# EAGLE board 4channelRock (EAGLE 7.1.0)

No outline drawn. Coordinates in mm, seen from the top.
Copper layers (1*16): Top 0.035mm / dielectric 1.5mm / Bottom 0.035mm
Design rules "default": minimum track width 10mil, minimum drill 24mil, track to track 8mil, track to pad 8mil, pad to pad 8mil, via to via 8mil, smd to smd 8mil, copper to edge 40mil, drill to drill 8mil, minimum pad ring 10mil, minimum via ring 8mil, stop-mask expansion 4mil, vias tented up to drill 0mil, thermal gap 10mil
Net classes: 0 default: width 0.203 mm; 1 vcc: width 0.254 mm

## Footprints (pad centres in the part's own frame; a part is rotated, then mirrored left to right if it is on the bottom)
DO-214AC = smd 1.8 x 2.4: A 2.025,0; C -2.025,0
SPC4078 = drill 0.8 pad 2.184 long: 1 -3,0; 2 0,-4.8 | drill 1 pad 2.184 long: 3 3,0
1X02 = drill 1.016 pad 1.88: 1 0,0; 2 2.54,0
SOT-23 = smd 0.8 x 0.9: 1 -0.95,-1; 2 0.95,-1; 3 0,1.1
R0603 = smd 1 x 1.1: 1 -0.85,0; 2 0.85,0

## Placement (x,y rotation side)
D1  [DO-214AC]  13.59,13.72 90 top
D2  [DO-214AC]  23.24,13.46 90 top
D3  [DO-214AC]  14.48,19.81 270 bottom
D4  [DO-214AC]  23.62,19.43 270 top
J1  [SPC4078]  18.67,31.5 270 top
JP1  [1X02]  10.92,8 0 top
JP2  [1X02]  22.99,7.62 0 top
JP3  [1X02]  26.8,23.88 180 top
JP4  [1X02]  8.38,23.75 0 top
JP5  [1X02]  18.54,16.89 90 top
JP6  [1X02]  18.54,14.35 270 top
Q1  IRLML0060  [SOT-23]  15.37,13.59 180 top
Q2  IRLML0060  [SOT-23]  25.91,13.59 180 top
Q3  IRLML0060  [SOT-23]  12.95,19.94 0 top
Q4  IRLML0060  [SOT-23]  21.34,19.43 0 top
R2  10K  [R0603]  15.49,15.62 0 top
R4  10K  [R0603]  25.78,15.75 0 top
R6  10K  [R0603]  21.34,17.53 180 top
R7  10K  [R0603]  12.95,17.78 180 top

## Library data of the parts
D1-D4 = diode
J1 = con-jack; OC_FARNELL: unknown; OC_NEWARK: unknown
JP1-JP6 = SparkFun-Connectors
Q1-Q4 = spietz-library
R2 R4 R6 R7 = resistor

## Nets
D9: JP5.2 Q3.1 R7.2
D10: JP5.1 Q1.1 R2.2
D11: JP6.2 Q2.1 R4.2
D12: JP6.1 Q4.1 R6.2
GND: D1.A D2.A D3.A D4.A J1.1 J1.2 Q1.2 Q2.2 Q3.2 Q4.2 R2.1 R4.1 R6.1 R7.1
N$2: D3.C JP4.2 Q3.3
N$3: D1.C JP1.2 Q1.3
N$4: D2.C JP2.2 Q2.3
N$10: D4.C JP3.2 Q4.3
VPOWER: J1.3 JP1.1 JP2.1 JP3.1 JP4.1

## Tracks (layer width: path | path; a pad name or v marks a point on that pad's centre or on a via)
D9  (2 unrouted)
D10  (2 unrouted)
D11  (2 unrouted)
D12  (2 unrouted)
GND  (13 unrouted)
N$2  (2 unrouted)
N$3  (2 unrouted)
N$4  (2 unrouted)
N$10  (2 unrouted)
VPOWER  (4 unrouted)